# EAGLE board xbee_2017_v2 (EAGLE 8.6.0)
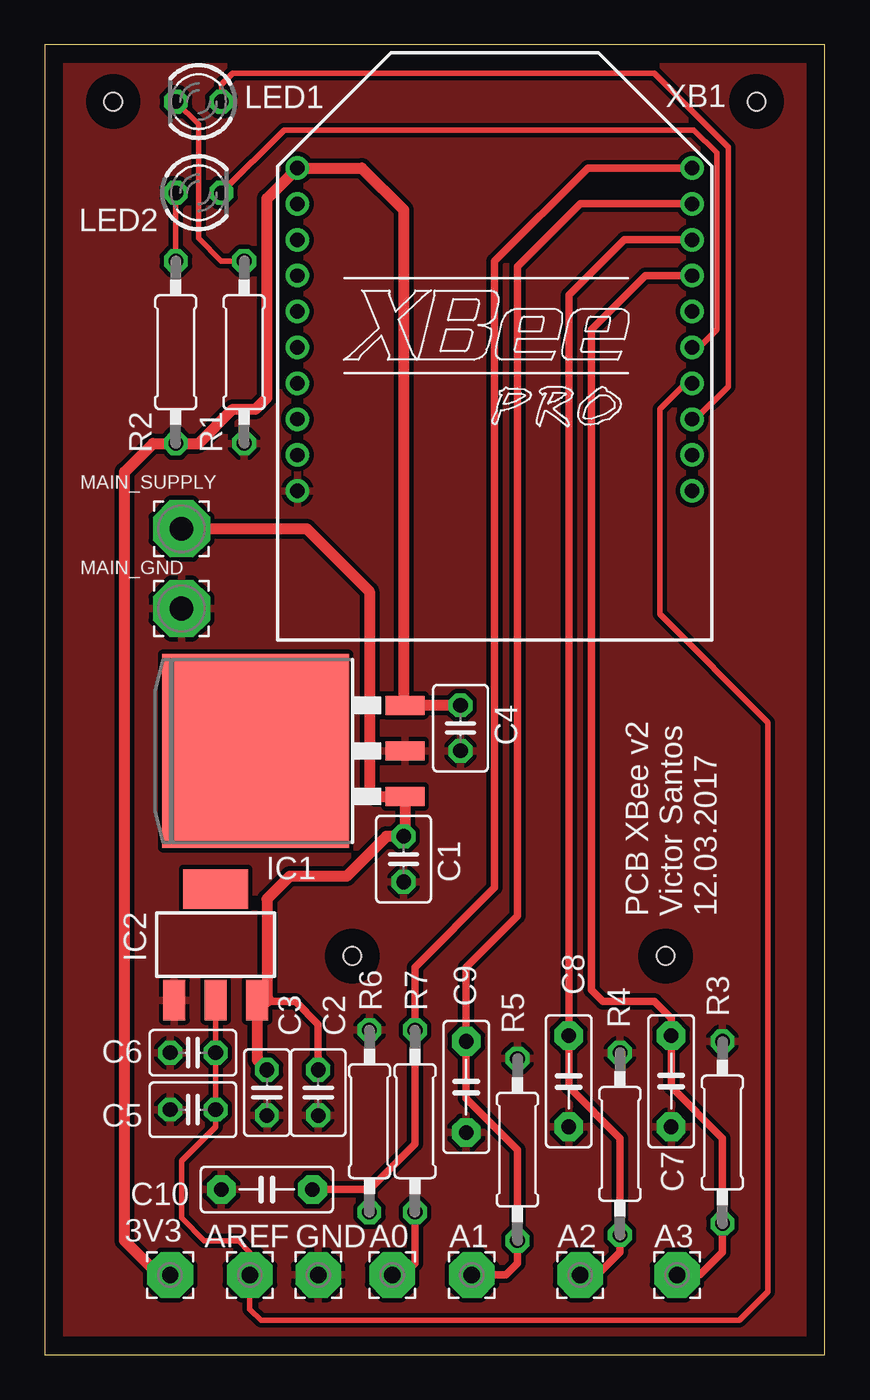
[diagram p0: board, top side]
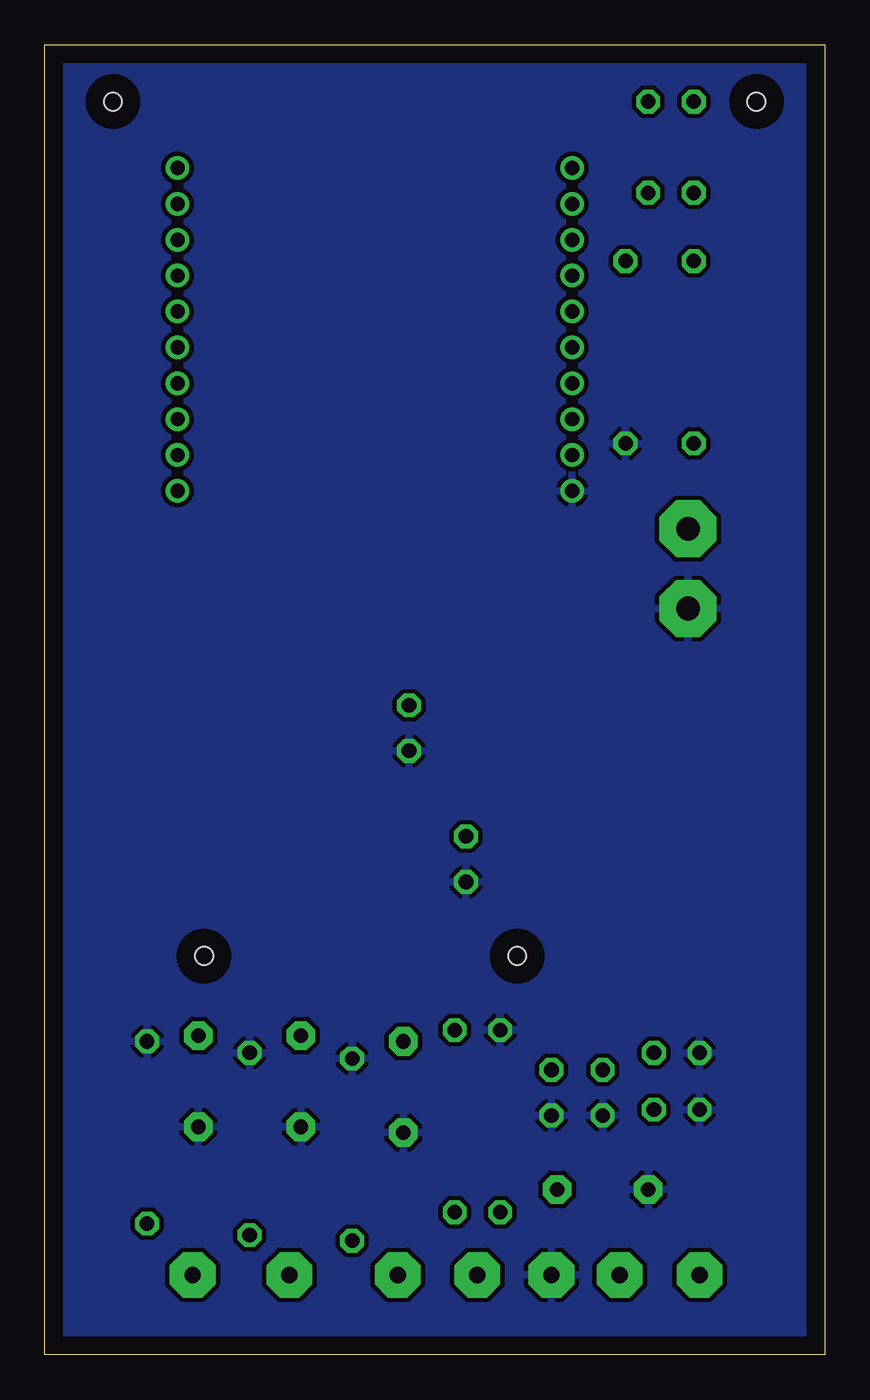
[diagram p1: board, bottom side, seen from below]

Size 43.48 x 73.02 mm. Coordinates in mm from the lower left corner, seen from the top.
Outline: 0,0 43.49,0 43.49,73.02 0,73.02 0,0
Copper layers (1*16): Top 0.035mm / dielectric 1.5mm / Bottom 0.035mm
Design rules "default": minimum track width 10mil, minimum drill 24mil, track to track 8mil, track to pad 8mil, pad to pad 8mil, via to via 8mil, smd to smd 8mil, copper to edge 40mil, drill to drill 8mil, minimum pad ring 10mil, minimum via ring 8mil, stop-mask expansion 4mil, vias tented up to drill 0mil, thermal gap 10mil
Net classes: 0 default: width 0.305 mm, drill 0.508 mm, clearance 0.254 mm
Holes 1 mm at 34.61,22.22 17.14,22.22 3.81,69.85 39.69,69.85

## Footprints (pad centres in the part's own frame; a part is rotated, then mirrored left to right if it is on the bottom)
2,54/0,9 = drill 0.914 pad 2.54 octagon: 1 0,0
C025-030X050 = drill 0.813 octagon: 1 -1.27,0; 2 1.27,0
C025-025X050 = drill 0.813 octagon: 1 -1.27,0; 2 1.27,0
C5B2.5 = drill 0.813 pad 1.6 octagon: 1 -2.54,0; 2 2.54,0
TO263-3 = smd 1.067 x 2.159: 1 -2.54,-5.791; 2 0,-5.791; 3 2.54,-5.791 | smd 10.8 x 10.41: TAB 0,2.54
SOT223 = smd 1.219 x 2.235: 1 -2.311,-3.099; 2 0,-3.099; 3 2.311,-3.099 | smd 3.6 x 2.2: TAB 0,3.099
LED3MM = drill 0.813 octagon: A -1.27,0; K 1.27,0
3,17/1,3 = drill 1.321 pad 3.175 octagon: 1 0,0
0207/10 = drill 0.813 octagon: 1 -5.08,0; 2 5.08,0
XBEE-PRO = drill 0.8 pad 1.27: 1 -11,9; 2 -11,7; 3 -11,5; 4 -11,3; 5 -11,1; 6 -11,-1; 7 -11,-3; 8 -11,-5; 9 -11,-7; 10 -11,-9; 11 11,-9; 12 11,-7; 13 11,-5; 14 11,-3; 15 11,-1; 16 11,1; 17 11,3; 18 11,5; 19 11,7; 20 11,9

## Placement (x,y rotation side)
3V3  [2,54/0,9]  6.98,4.44 0 top
A0  [2,54/0,9]  19.37,4.44 0 top
A1  [2,54/0,9]  23.81,4.44 0 top
A2  [2,54/0,9]  29.84,4.44 0 top
A3  [2,54/0,9]  35.24,4.44 0 top
AREF  [2,54/0,9]  11.43,4.44 0 top
C1  10uF/16V  [C025-030X050]  20,27.62 270 top
C2  220nF  [C025-025X050]  12.38,14.61 270 top
C3  10uF/16V  [C025-030X050]  15.24,14.61 270 top
C4  10uF/16V  [C025-030X050]  23.18,34.93 270 top
C5  10uF/16V  [C025-030X050]  8.25,13.65 180 top
C6  220nF  [C025-025X050]  8.25,16.83 180 top
C7  470nF  [C5B2.5]  34.92,15.24 90 top
C8  470nF  [C5B2.5]  29.21,15.24 270 top
C9  470nF  [C5B2.5]  23.49,14.92 270 top
C10  470nF  [C5B2.5]  12.38,9.21 180 top
GND  [2,54/0,9]  15.24,4.44 0 top
IC1  [TO263-3]  14.29,33.66 90 top
IC2  LM1117IMPX-3.3  [SOT223]  9.53,22.86 0 top
LED1  red  [LED3MM]  8.57,69.85 180 top
LED2  red  [LED3MM]  8.57,64.77 0 top
MAIN_GND  [3,17/1,3]  7.62,41.59 0 top
MAIN_SUPPLY  [3,17/1,3]  7.62,46.04 0 top
R1  470R  [0207/10]  11.11,55.88 90 top
R2  470R  [0207/10]  7.3,55.88 270 top
R3  10k  [0207/10]  37.78,12.38 90 top
R4  10k  [0207/10]  32.07,11.75 270 top
R5  10k  [0207/10]  26.35,11.43 90 top
R6  10k  [0207/10]  18.1,13.02 90 top
R7  10k  [0207/10]  20.64,13.02 90 top
XB1  XBEE-PRO  [XBEE-PRO]  25.08,57.15 0 top

## Library data of the parts
3V3 A0 A1-A3 AREF GND MAIN_GND MAIN_SUPPLY = wirepad
C1-C6 R1-R7 = resistor
C7-C10 = capacitor-wima
IC1 = linear
IC2 = lm1117
LED1 LED2 = led
XB1 = maxstream; MPN: XBP24-AWI-001; OC_FARNELL: 1337916; OC_NEWARK: 42M2667

## Nets
GND: C1.2 C2.2 C3.2 C4.2 C5.2 C6.2 C7.1 C8.2 C9.2 C10.2 GND.1 IC1.2 IC2.1 MAIN_GND.1 R1.1 R3.2 R4.1 R5.2 R6.2 XB1.10
N$3: LED1.K R1.2
N$4: LED2.A R2.1
N$5: LED2.K XB1.15
N$6: LED1.A XB1.13
N$7: A1.1 C9.1 R5.1 XB1.19
N$9: C10.1 R6.1 R7.2 XB1.20
N$10: A3.1 C7.2 R3.1 XB1.17
N$11: A2.1 C8.1 R4.2 XB1.18
S$1: A0.1 R7.1
VCC: C1.1 C2.1 C3.1 IC1.1 IC2.3 MAIN_SUPPLY.1
VOUT_3.3: 3V3.1 C4.1 IC1.3 R2.2 XB1.1
VREF: AREF.1 C5.1 C6.1 IC2.2 XB1.14

## Tracks (layer width: path | path; a pad name or v marks a point on that pad's centre or on a via)
GND
  pour Bottom: 0,73.02 43.81,73.02 43.81,-0.32 0,-0.32
  pour Top: 0,73.02 43.81,73.02 43.81,0 0,0
N$3
  Top 0.305: LED1.K 8.57,68.58 8.57,62.23 9.84,60.96 R1.2
N$4
  Top 0.305: LED2.A R2.1
N$5
  Top 0.305: XB1.15 36.47,56.15 37.47,57.15 37.47,66.99 36.2,68.26 13.34,68.26 LED2.K
N$6
  Top 0.254: 9.84,70.8 LED1.A
  Top 0.305: XB1.13 36.27,52.15 38.1,53.98 38.1,67.31 33.97,71.44 10.48,71.44 9.84,70.8
N$7
  Top 0.406: A1.1 25.72,4.44 26.35,5.08 R5.1 26.35,11.43 23.49,14.29 C9.1 23.49,21.59 26.35,24.45 26.35,60.64 29.86,64.15 XB1.19
N$9
  Top 0.406: 18.1,9.21 20.64,11.75 R7.2 20.64,21.59 25.08,26.04 25.08,60.96 30.27,66.15 XB1.20 | 18.1,9.21 R6.1 | C10.1 18.1,9.21
N$10
  Top 0.406: A3.1 36.51,4.44 37.78,5.72 R3.1 37.78,12.06 34.92,14.92 C7.2 34.92,18.73 33.97,19.68 31.11,19.68 30.48,20.32 30.48,25.08 30.48,25.72 30.48,57.15 33.48,60.15 XB1.17
N$11
  Top 0.406: A2.1 30.8,4.44 32.07,5.72 R4.2 32.07,12.06 29.21,14.92 C8.1 29.21,59.05 32.31,62.15 XB1.18
S$1
  Top 0.406: R7.1 20.64,5.08 20,4.44 A0.1
VCC
  Top 0.406: C3.1 15.24,18.41 13.97,19.68 12.7,19.68 12.38,20
  Top 0.61: MAIN_SUPPLY.1 14.6,46.04 18.1,42.55 18.1,31.43 18.42,31.11 IC1.1 20.08,28.97 C1.1 19.05,28.89 16.83,26.67 13.65,26.67 12.38,25.4 12.38,20 12.38,19.68 11.91,19.68 IC2.3 11.84,16.42 C2.1
VOUT_3.3
  Top 0.61: C4.1 IC1.3 20,36.27 20,63.82 17.67,66.15 XB1.1 12.38,64.45 12.38,53.34 11.75,52.71 10.48,52.71 8.57,50.8 R2.2 6.03,50.8 4.45,49.21 4.45,6.35 6.35,4.44 3V3.1
VREF
  Top 0.305: IC2.2 C6.1 C5.1 9.53,12.7 7.62,10.79 7.62,7.62 8.89,6.35 10.8,6.35 11.43,5.72 AREF.1 11.43,2.54 12.06,1.91 38.74,1.91 40.32,3.49 40.32,35.24 34.29,41.28 34.29,52.71 35.74,54.15 XB1.14

## Text on the board
tNames: PCB XBee v2 / Victor Santos / 12.03.2017